# Altium PCB ShieldBoard.PcbDoc
Units mil, origin at the board's own origin, x right, y up, seen from the top; angles counter-clockwise.
Board outline 2700 x 2100 mil, 2 copper layers (Top Layer, Bottom Layer), stack 62.8 mil thick; 15 components, 31 nets, 62 pads, 20 vias.
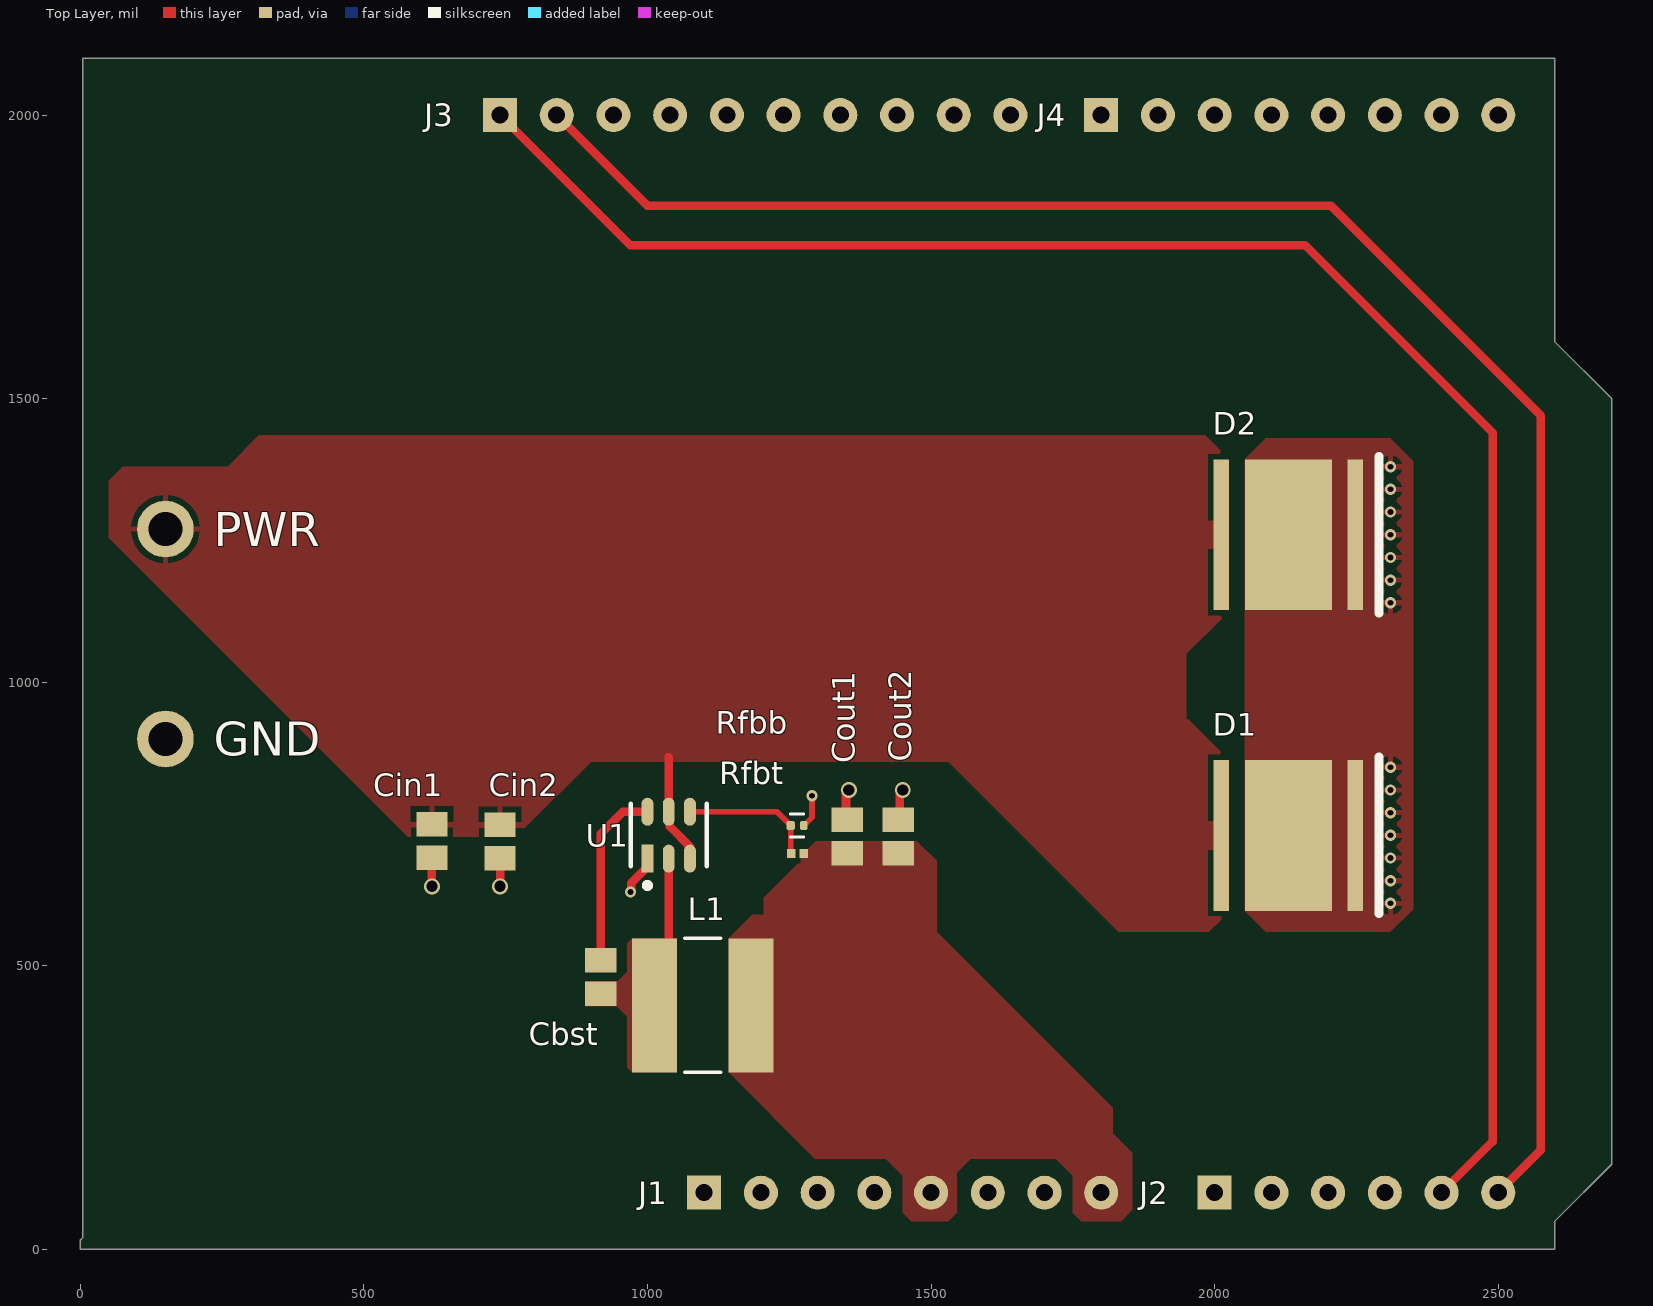
[diagram p0: Top Layer view]
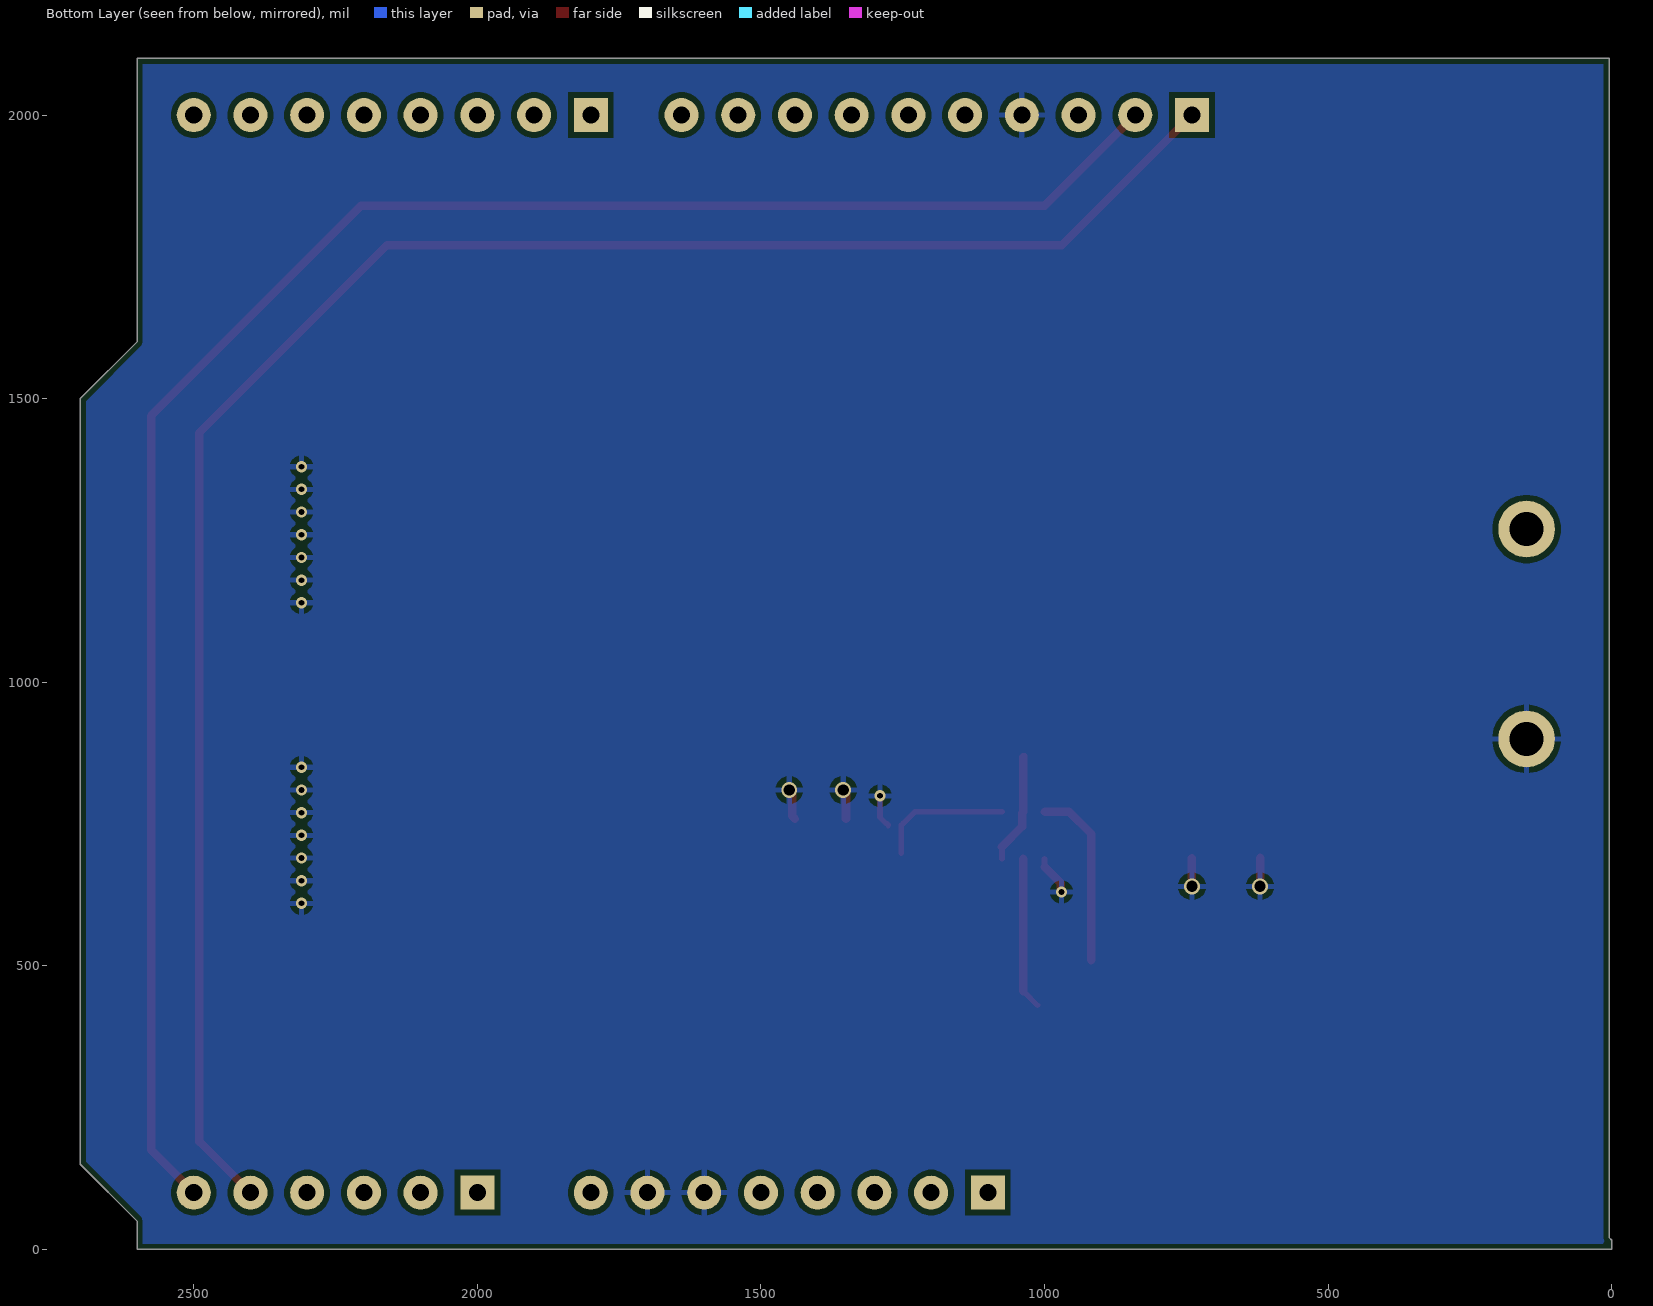
[diagram p1: Bottom Layer view, seen from below]

## Layer stack, top to bottom
Top Solder: solder mask 0.4, Solder Resist, Dk 3.5
Top Layer: signal copper 1.4
Dielectric 1: dielectric 60, FR-4, Dk 4.8
Bottom Layer: signal copper 1.4
Bottom Solder: solder mask 0.4, Solder Resist, Dk 3.5

## Board outline
0,0 0,16.02 4.69,20.71 4.69,2100 2600,2100 2600,1600 2700,1500 2700,150 2600,50 2600,0

## Design rules (kind name [scope] priority, off if disabled: settings)
BoardOutlineClearance [All] p1: gap=10 ignorepadtopadclearanceinfootprint=FALSE
Clearance [All] p1: gap=10 ignorepadtopadclearanceinfootprint=FALSE
MinimumSolderMaskSliver [All] p1: minsoldermaskwidth=5
PolygonConnect [All] p1: connectstyle=Relief reliefconductorwidth=10 reliefentries=4 polygonreliefangle="90 Angle" airgapwidth=10
RoutingVias [All] p1: holewidth=10 width=18 viastyle="Through Hole" minholewidth=6 minwidth=14 maxholewidth=28 maxwidth=50
SolderMaskExpansion [All] p1: expansion=0 istentingtop=FALSE
SupplyNets "Schematic Supply Nets_2" [InNet('+12')] p1: voltage=0.000
SupplyNets "Schematic Supply Nets_1" [InNet('+5')] p2: voltage=0.000
SupplyNets "Schematic Supply Nets" [InNet('GND')] p3: voltage=0.000
Width [All] p1: maxlimit=30 minlimit=5 preferedwidth=10
29 further rules are at their usual default settings.

## Components (designator, comment, footprint, x,y, rotation, side; value= is the part's Value field where it differs from the comment)
Cbst "08053C104KAT2A" C0805 917.41,480.27 r90 top value=100nF
Cin1 "MSAST219LB5106KTNA01" C0805 620,719.68 r90 top value=10µF
Cin2 "MSAST219LB5106KTNA01" C0805 740,719.21 r90 top value=10µF
Cout1 "MSASL219LB5226MTNA01" C0805 1352.03,727.87 r270 top value=22µF
Cout2 "MSASL219LB5226MTNA01" C0805 1442.03,727.87 r270 top value=22µF
D1 "MKRAWT-00-0000-0D0HG235H" CREE-MK-R-2_V 2130,730 r0 top
D2 "MKRAWT-00-0000-0D0HG235H" CREE-MK-R-2_V 2130,1260 r0 top
J1 "8-Pin-Header" 8-Pin-Header-Footprint-1 1100,100 r0 top
J2 "6-Pin-Header" 6-Pin-Header-Footprint-1 2000,100 r0 top
J3 "10-Pin-Header" 10-Pin-Header-Footprint-1 740,2000 r0 top
J4 "8-Pin-Header" 8-Pin-Header-Footprint-1 1800,2000 r0 top
L1 "SRN6045-4R7Y" SRN6045 1097.41,430.27 r0 top value=4.7µH
Rfbb "RC0201FR-0710KL" RESC0603X26N#1 1263.56,747.36 r180 top value=10k
Rfbt "RC0201FR-0756K2L" RESC0603X26N#2 1264.11,697.87 r0 top value=56.2k
U1 "TPS562201DDCR" FP-DDC0006A-IPC_C 1037.41,730.27 r90 top

## Footprints (in the part's own frame and the unit in brackets; to place one, negate y for a bottom-side part, rotate by r counter-clockwise, add the part's x,y. Pads: shape width x height; smd on the part's side, far side on the other; paste and mask are expansions set on the pad)
6-Pin-Header-Footprint-1 [mil]
  rect 60x60 hole 30: 1(0,0)
  round 60 hole 30: 2(100,0) 3(200,0) 4(300,0) 5(400,0) 6(500,0)
8-Pin-Header-Footprint-1 [mil]
  rect 60x60 hole 30: 1(0,0)
  round 60 hole 30: 2(100,0) 3(200,0) 4(300,0) 5(400,0) 6(500,0) 7(600,0) 8(700,0)
10-Pin-Header-Footprint-1 [mil]
  rect 60x60 hole 30: 1(0,0)
  round 60 hole 30: 2(100,0) 3(200,0) 4(300,0) 5(400,0) 6(500,0) 7(600,0) 8(700,0) 9(800,0) 10(900,0)
C0805 [mm] "Chip Capacitor, Body 2.0x1.3mm, IPC High Density"
  rect 1.1x1.4 smd: 1(-0.75,0) 2(0.75,0)
  body extent -1.1,-0.72 1.1,0.72, height 1.4
CREE-MK-R-2_V [mm] "SMD, 2-Leads, Body 7x7mm, Thermal Pad 3.9x6.76mm"
  rect 0.7x6.76 smd: 1(-3,0) 2(3,0)
  rect 3.9x6.76 smd: 3(0,0)
  silkscreen extent 4.05,-3.5 4.05,3.5, body extent -3.5,-3.5 3.5,3.5, height 4.1
FP-DDC0006A-IPC_C [mm]
  rect 1.254x0.532 smd paste+0 mask+0: 1(-1.05,0.95)
  rrect100% 1.254x0.532 smd paste+0 mask+0: 2(-1.05,0) 3(-1.05,-0.95) 4(1.05,-0.95) 5(1.05,0) 6(1.05,0.95)
  silkscreen extent -2.37,-1.7 1.4,1.7, body extent -1.78,-1.55 1.78,1.55, height 0.25
RESC0603X26N#1 [mm]
  rrect50% 0.33x0.4 smd: 1(-0.305,0)
  rrect50% 0.38x0.4 smd: 2(0.28,0)
  silkscreen extent -0.3,-0.52 0.3,0.52, body extent -0.3,-0.15 0.3,0.15, height 0.26
RESC0603X26N#2 [mm]
  rect 0.38x0.4 smd: 1(-0.281,0) 2(0.281,0)
  body extent -0.3,-0.15 0.3,0.15, height 0.26
SRN6045 [mil]
  rect 79x236 smd: 1(-85,0) 2(85,0)
  silkscreen extent -32,-118 32,118

## Part data
Cbst: library part CMP-001-00084-2, "0805 100 nF 25V ±10 % Tolerance X7R Surface Mount Multilayer Ceramic Capacitor", Case/Package=0805, Max Operating Temperature=125°C, Min Operating Temperature=-55°C, Tolerance=10%, Voltage Rating=25V, Mounting Technology="Surface Mount", Pins=2
Cin1 Cin2: library part CMP-001-00083-2, "Ceramic Capacitor, Multilayer, Ceramic, 25V, 10% +Tol, 10% -Tol, X5R, 15% TC, 10uF, Surface Mount, 0805", Dielectric Material=Ceramic, Max Operating Temperature=85°C, Min Operating Temperature=-55°C, Voltage Rating (DC)=25V, Height=850µm, Length=2mm, Lifecycle Status=Production, Mounting Technology="Surface Mount", Number of Terminals=2, REACH SVHC=Yes, RoHS=Compliant, Width=1.25mm
Cout1 Cout2: library part CMP-001-00085-3, "Ceramic Capacitor, Multilayer, Ceramic, 10V, 20% +Tol, 20% -Tol, X5R, 15% TC, 22uF, Surface Mount, 0805", Max Operating Temperature=85°C, Min Operating Temperature=-55°C, Mounting Technology="Surface Mount"
D1 D2: library part CMP-2100-00977-1, "LED, White, 12 V, 2-Pin SMD, RoHS, Tape and Reel"
J1 J4: library part CMP-00004-1, Color=Black, Manufacturer Lifecycle Status=PRODUCTION, Voltage Rating (AC)=465V, Voltage Rating (DC)=655V, Connector Type="Receptacle, Socket", Contact Material=Bronze, Contact Plating=Tin, Height=8.51mm, Housing Color=Black, Housing Material=Plastic, Lead Free="Lead Free", Length=20.8mm, Lifecycle Status=Production, Mounting Technology="Through Hole", Number of Contacts=8, Number of Positions=8, Number of Rows=1, Packaging=Bulk, Pitch=2.54mm, Radiation Hardening=No, RoHS=Compliant, Termination=Solder, Width=2.41mm
J2: library part CMP-00003-1, Color=Black, Current Rating=6.3A, Manufacturer Lifecycle Status=PRODUCTION, Max Operating Temperature=105°C, Min Operating Temperature=-55°C, Voltage Rating=655V, Voltage Rating (AC)=465V, Connector Type="Receptacle, Socket", Contact Material="Nickel, Tin", Contact Plating=Tin, Height=8.64mm, Housing Color=Black, Housing Material=Plastic, Lead Free="Lead Free", Length=15.8mm, Lifecycle Status=Production, Mounting Technology="Through Hole", Number of Contacts=6, Number of Positions=6, Number of Rows=1, Packaging=Bulk, Pitch=2.54mm, Radiation Hardening=No, RoHS=Compliant, Termination=Solder, Voltage Rating (DC)=655V, Width=2.41mm
J3: library part CMP-00005-2, Color=Black, Current Rating=6.3A, Manufacturer Lifecycle Status=PRODUCTION, Max Operating Temperature=105°C, Min Operating Temperature=-55°C, Voltage Rating=655V, Voltage Rating (AC)=465V, Connector Type="Receptacle, Socket", Contact Material="Nickel, Tin", Contact Plating=Tin, Height=8.64mm, Housing Color=Black, Housing Material=Plastic, Lead Free="Lead Free", Length=25.9mm, Lifecycle Status=Production, Mounting Technology="Through Hole", Number of Contacts=10, Number of Positions=10, Number of Rows=1, Packaging=Bulk, Pins=10, Pitch=2.54mm, Radiation Hardening=No, RoHS=Compliant, Termination=Solder, Voltage Rating (DC)=655V, Width=2.41mm
L1: library part CMP-006-00021-2, "Inductor Power Semi-Shielded Wirewound 4.7uH 30% 100KHz 15Q-Factor Ferrite 3A 37.6mOhm DCR T/R", Case/Package=2424, Current Rating=3A, Max Operating Temperature=125°C, Min Operating Temperature=-40°C, Self Resonant Frequency=22MHz, Tolerance=30%, Max Current Rating=3A, Mounting Technology="Surface Mount", Pins=2
Rfbb: library part CMP-009-00197-1, "10 kOhms Â±1% 0.05W, 1/20W Chip Resistor 0201 (0603 Metric) Moisture Resistant Thick Film", Case/Package="0201 Yageo", Check_prices=https://www.snapeda.com/parts/RC0201FR-0710KL/Yageo/view-part/?ref=eda, Component Type=Standard, Design Item ID=RC0201FR-0710KL, MF=Yageo, MP=RC0201FR-0710KL, Pins=2, SnapEDA_Link=https://www.snapeda.com/parts/RC0201FR-0710KL/Yageo/view-part/?ref=snap, Source=RC0201FR-0710KL.SchLib
Rfbt: library part CMP-009-00178-2, "Res Thick Film 0201 56.2K Ohm 1% 0.05W(1/20W) ±200ppm/C Molded SMD Paper T/R", Case/Package=0201, Max Operating Temperature=125°C, Min Operating Temperature=-55°C, Tolerance=1%, Voltage Rating=25V, Mounting Technology="Surface Mount"
U1: library part CMP-04918-000361-1, "IC REG BUCK ADJ 2A TSOT23-6", Case/Package=SOT, Max Input Voltage=17V, Max Operating Temperature=125°C, Max Output Current=2A, Min Input Voltage=4.5V, Min Operating Temperature=-40°C, Output Voltage=7V, Quiescent Current=400uA, Switching Frequency=580kHz, Contact Plating=Tin, Lead Free="Lead Free", Mount="Surface Mount", Number of Outputs=1, Number of Pins=6, Operating Supply Voltage=17V, Output Type=Adjustable, RoHS Compliant=Yes

## Free pads (board coordinates)
  round 100 hole 60: 5(150,1270) 6(150,900)

## Via types
v1: diameter 20, hole 10, Top Layer to Bottom Layer, 16 vias
v2: diameter 28, hole 20, Top Layer to Bottom Layer, 4 vias

## Nets (pads, with @x,y where several pads share a name; then routed paths per layer and width w, separated by ;. In a path a pad name is that pad's centre, name@x,y a point inside that pad or via, vN(x,y) a via of type N, cw(c..) or ccw(c..) an arc to the next point about the centre after c; other vN are vias at no path point)
3.3V: J1.4
+5: Cout1.2 Cout2.2 J1.5 J1.8 L1.2 Rfbt.2
+12: Cin1.2 Cin2.2 D1.1 D2.1 pad.5 U1.3 U1.5 | length 194.8
  Top Layer w10: 1035,870 1037.41,867.59 ; U1.3 1075,689.12 U1.3@1075,710
  Top Layer w15: U1.5 1037.41,867.59 ; U1.5@1039.5,769.53 1039.5,745.5 U1.3@1075,710
A0: J2.1
A1: J2.2
A2: J2.3
A3: J2.4
A4: J2.5 J3.1 | length 3359.2
  Top Layer w15: J3.1 970,1770 2160,1770 2490,1440 2490,190 J2.5
A5: J2.6 J3.2 | length 3355.6
  Top Layer w15: J3.2 1000,1840 2205,1840 2575,1470 2575,175 J2.6
AREF: J3.3
D0: J4.8
D1: J4.7
D2: J4.6
D3: J4.5
D4: J4.4
D5: J4.3
D6: J4.2
D7: J4.1
D8: J3.10
D9: J3.9
D10: J3.8
D11: J3.7
D12: J3.6
D13: J3.5
GND: Cin1.1 Cin2.1 Cout1.1 Cout2.1 D1.2 D1.3 D2.2 D2.3 J1.6 J1.7 J3.4 pad.6 Rfbb.1 U1.1 | length 343.3
  Top Layer w10: U1.1@1000.01,674.71 U1.1 ; Rfbb.1 1275.56,748.74 1277.06,750.24 1278.44,750.24 1289.94,761.73 1289.94,799.51 v1(1290,799.58) ; Cout1.1@1350,759.43 Cout1.1 ; Cout2.1@1440,759.43 Cout2.1
  Top Layer w15: v2(620,640) Cin1.1 ; v2(740,640) Cin2.1 ; v1(970,630) 970.96,630.96 970.96,645.66 U1.1@1000.01,674.71 ; Cout1.1@1350,759.43 1350,801.48 1355,806.48 v2(1355,810) ; Cout2.1@1440,759.43 1445,764.43 1445,801.48 1450,806.48 v2(1450,810)
  other v1: 2310,610 2310,650 2310,690 2310,730 2310,770 2310,810 2310,850 2310,1140 2310,1180 2310,1220 2310,1260 2310,1300 2310,1340 2310,1380
IOREF: J1.2
N-C: J1.1
NetCbst_2: Cbst.2 U1.6 | length 321.4
  Top Layer w15: Cbst.2 917.41,732.41 956.62,771.62 U1.6
NetRfbb_2: Rfbb.2 Rfbt.1 U1.4 | length 237
  Top Layer w10: U1.4 1228.27,771.62 1249.15,750.75 1249.54,750.75 1252.02,748.27 1252.02,747.87 Rfbb.2 Rfbt.1@1252.53,698.39
RESET: J1.3
"SW OUT": Cbst.1 L1.1 U1.2 | length 269
  Top Layer w10: L1.1 L1.1@1037.41,455.27
  Top Layer w15: L1.1@1037.41,455.27 U1.2

## Polygon pours and split planes (outlines as drawn)
+5 on Top Layer "+5_L01_P012" (solid, pour order 12): 1142.91,548.27 1143.27,548.27 1185,590 1205,590 1205,620 1267.69,682.69 1267.69,705.75 1282.65,705.75 1296.9,720 1475,720 1510,685 1510,560 1820,250 1820,205 1855,170 1855,70 1835,50 1765,50 1750,65 1750,130 1720,160 1570,160 1545,135 1545,65 1530,50 1465,50 1450,65 1450,130 1420,160 1295.18,160 1142.91,312.27
"SW OUT" on Top Layer "SW_OUT_L01_P013" (solid, pour order 13): 889.85,472.4 947.4,472.4 964.63,489.63 964.63,540 972.91,548.27 1051.91,548.27 1051.91,312.27 972.73,312.27 964.63,320.37 964.63,410.37 945.91,429.09 889.85,429.09
+12 on Top Layer "+12_L01_P008" (solid, pour order 8): 577.44,727.56 50,1255 50,1355 75,1380 260,1380 315,1435 1983.74,1435 2025.67,1393.07 2025.67,1125.67 1950,1050 1950,935 1953.74,935 2025.67,863.07 2025.67,595.67 1990,560 1830,560 1530,860 865,860 900.47,860 767.56,727.09 767.09,727.56
GND on Top Layer "GND_L01_P006" (solid, pour order 6): 2053.23,596.77 2090,560 2310,560 2350,600 2350,1390 2310,1430 2090,1430 2053.23,1393.23
GND on Bottom Layer "GND_L02_P005" (solid, pour order 5): 2600,0 2600,50 2700,150 2700,1500 2600,1600 2600,2100 4.69,2100 4.69,4.69 0,0

## Silkscreen, mask and mechanical layers (free items; w line width, h text height)
Top Overlay:
  text "PWR" at 235,1240 h60
  text "GND" at 235,870 h60